# Altium PCB PCB-R1-DEPP.PcbDoc
Units mm, origin at the board's own origin, x right, y up, seen from the top; angles counter-clockwise.
Board outline 74.3 x 74.3 mm, 2 copper layers (Top Layer, Bottom Layer); 45 components, 44 nets, 189 pads, 38 vias.
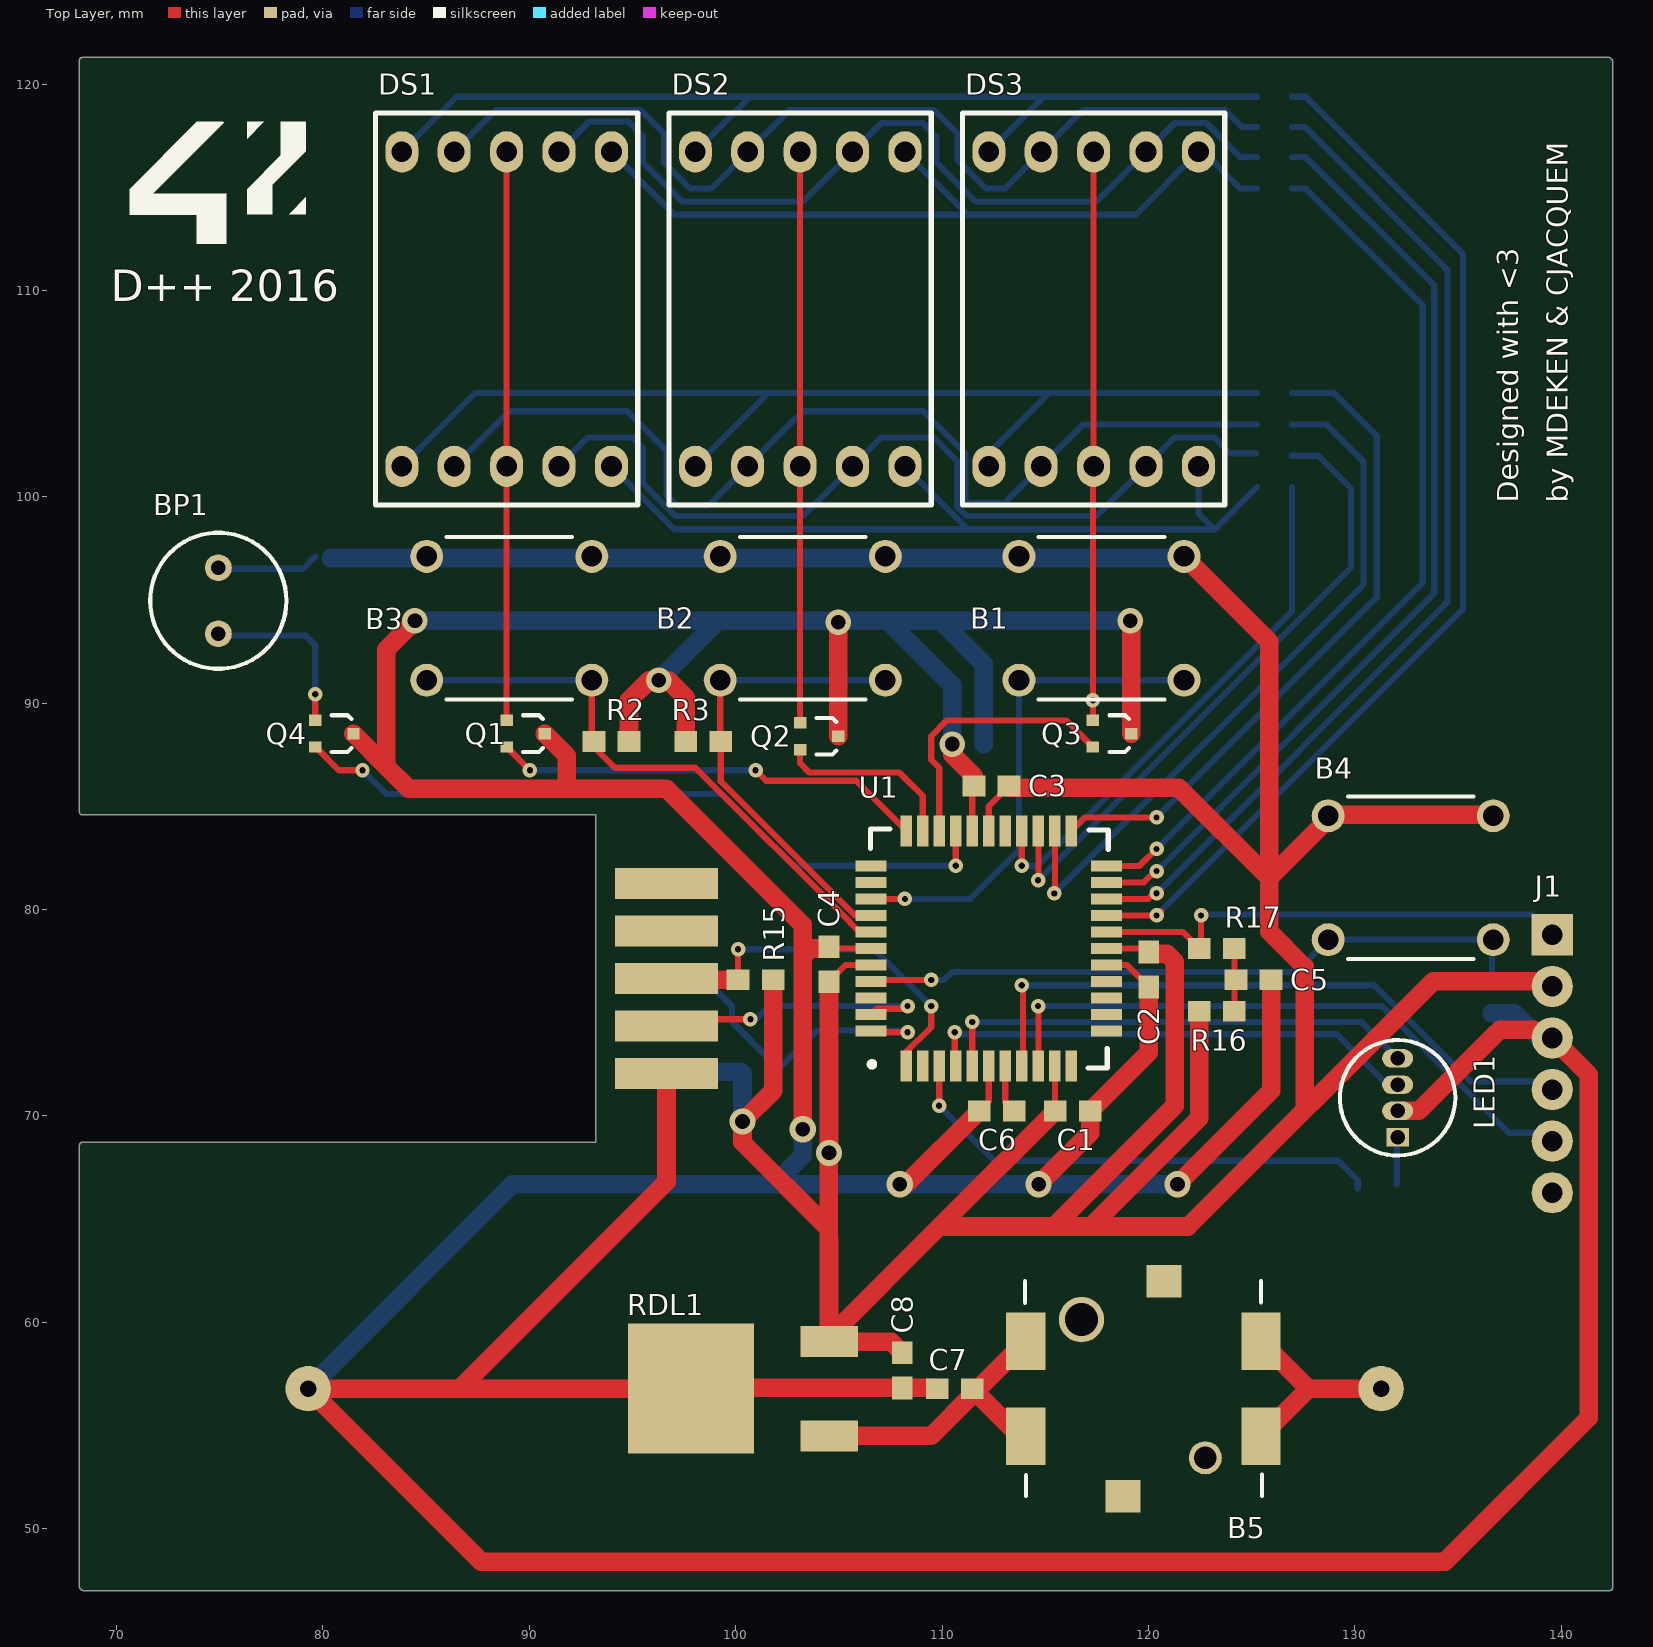
[diagram p0: Top Layer view]
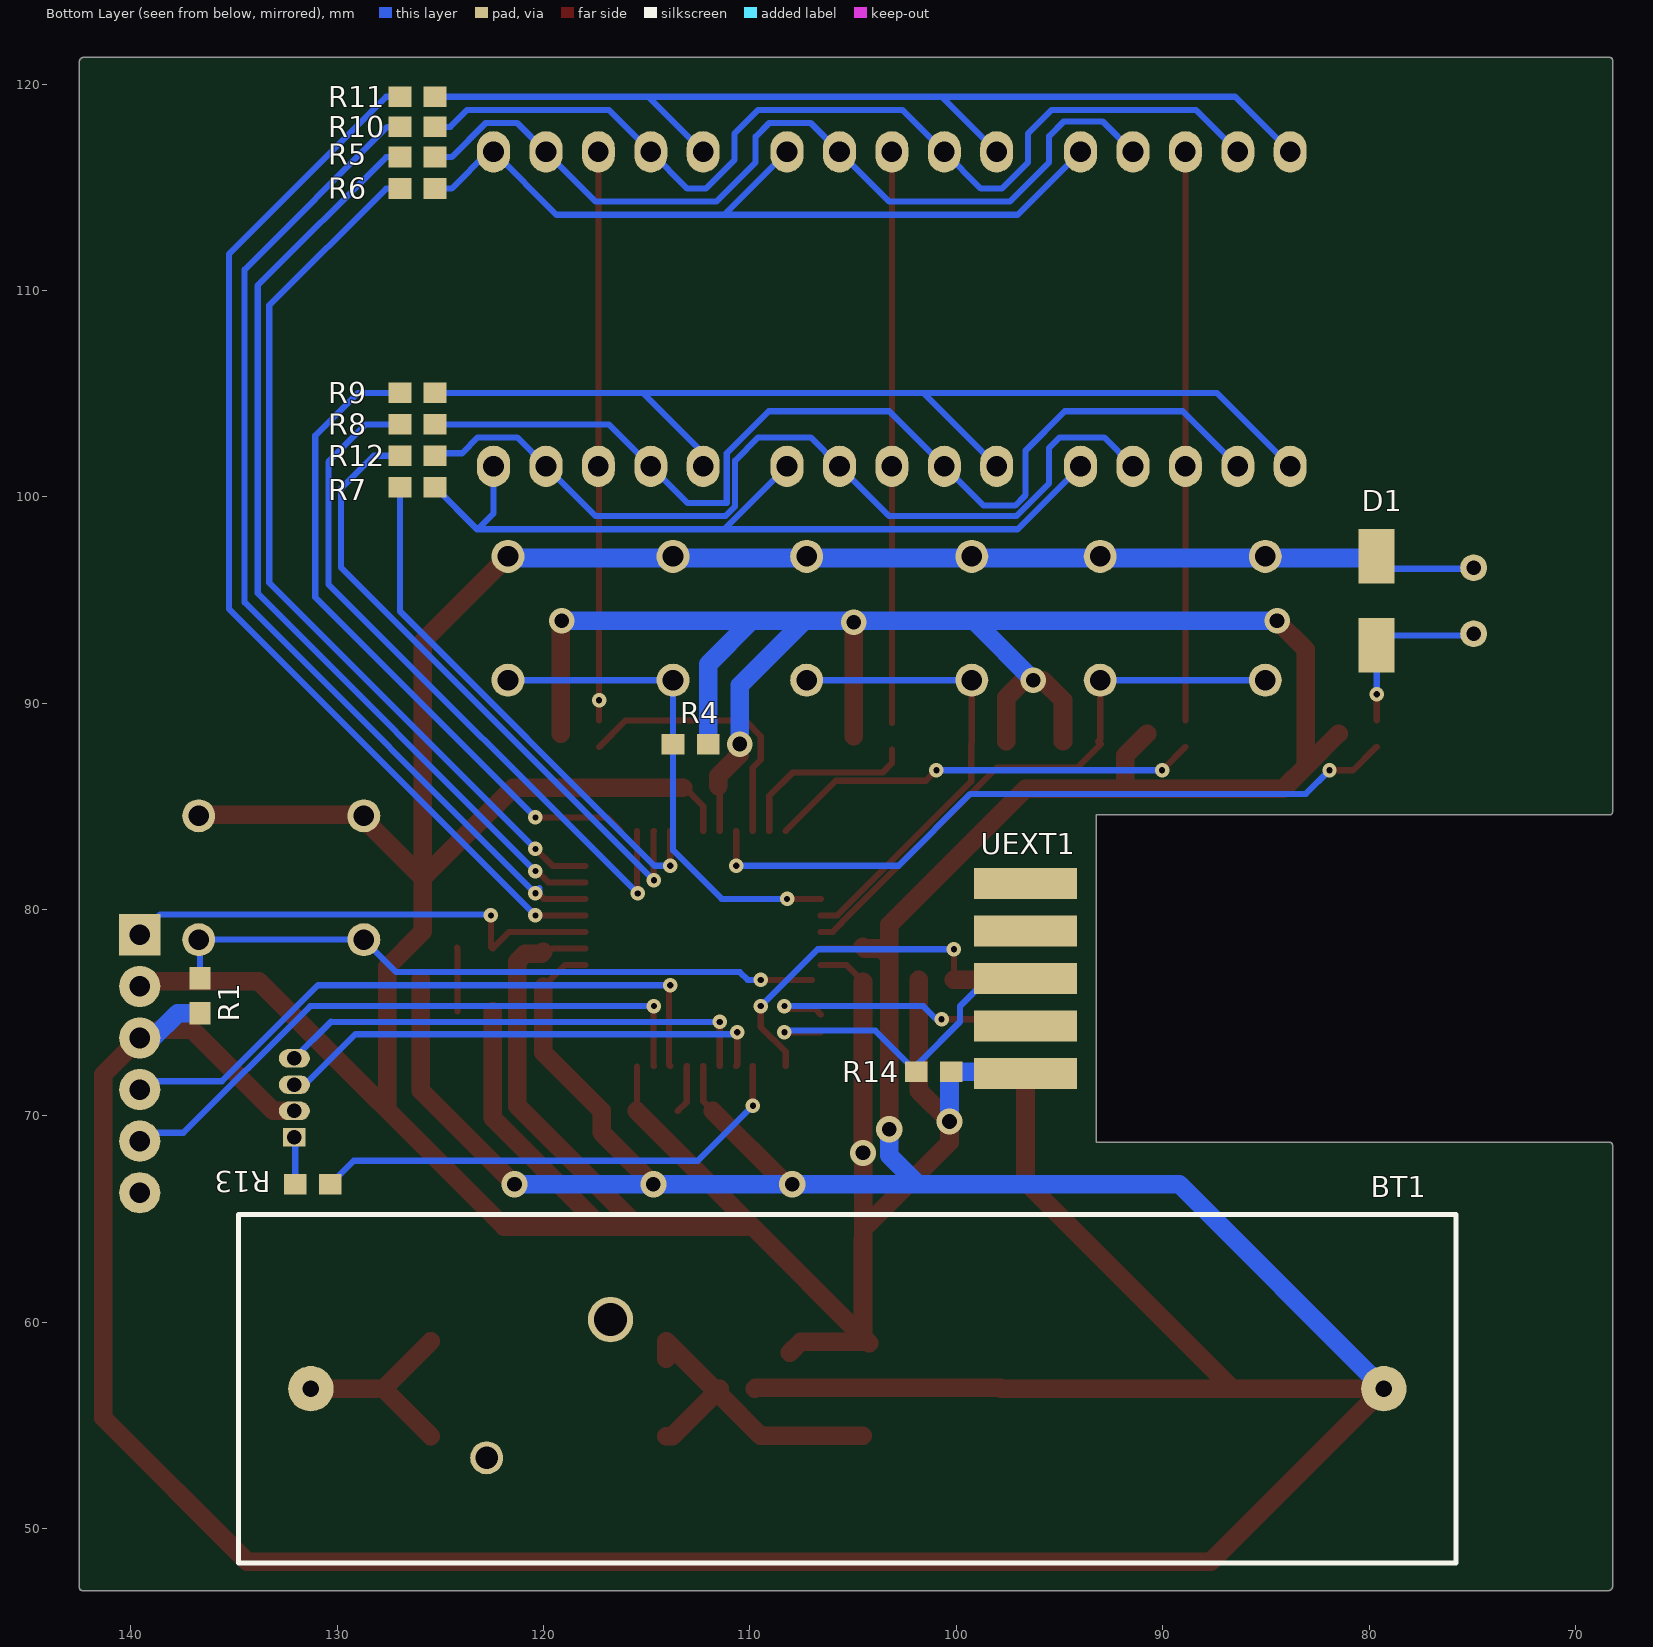
[diagram p1: Bottom Layer view, seen from below]

## Layer stack, top to bottom
Top Solder: solder mask 0.0102, Solder Resist, Dk 3.5
Top Layer: signal copper 0.0356
Dielectric 1: dielectric 0.32, FR-4, Dk 4.8
Bottom Layer: signal copper 0.0356
Bottom Solder: solder mask 0.0102, Solder Resist, Dk 3.5

## Board outline
68.259,47.05 cw(c68.326,47.158) 68.199,47.158 68.199,68.58 cw(c68.326,68.58) 68.326,68.707 93.218,68.707 93.218,84.582 68.326,84.582 cw(c68.326,84.709) 68.199,84.709 68.199,121.158 cw(c68.326,121.158) 68.326,121.285 142.326,121.285 cw(c142.326,121.158) 142.434,121.225 cw(c142.367,121.117) 142.494,121.117 142.494,47.117 cw(c142.367,47.117) 142.367,46.99 68.367,46.99 cw(c68.367,47.117)

## Design rules (kind name [scope] priority, off if disabled: settings)
Clearance [All] p1: gap=0.1
ComponentClearance [All] p1: gap=0.2 collisioncheckmode=3 verticalgap=0.2 showdistances=FALSE
MinimumSolderMaskSliver [All] p1: minsoldermaskwidth=0
PolygonConnect [All] p1: connectstyle=Relief reliefconductorwidth=0.254 reliefentries=4 polygonreliefangle="90 Angle" airgapwidth=0.254
RoutingVias [All] p1: holewidth=0.711 width=1.27 viastyle="Through Hole" minholewidth=0.711 minwidth=1.27 maxholewidth=0.711 maxwidth=1.27
SilkToSilkClearance [All] p1: silktosilkclearance=0.2
SilkToSolderMaskClearance [IsPad] p1: minsilkscreentomaskgap=0.2 clearancetoexposedcopper=TRUE
SolderMaskExpansion [All] p1: expansion=0.102
UnpouredPolygon [All] p1: allowunpoured=FALSE
Width [All] p1: maxlimit=1 minlimit=0.2 preferedwidth=0.7
25 further rules are at their usual default settings.

## Classes and differential pairs
net class RGB[0..2]: RGB0 RGB1 RGB2
net class DISPLAY[0..7]: DISPLAY0 DISPLAY1 DISPLAY2 DISPLAY3 DISPLAY4 DISPLAY5 DISPLAY6 DISPLAY7
net class DIS[0..2]: DIS0 DIS1 DIS2
net class BUTTON[0..3]: BUTTON0 BUTTON1 BUTTON2 BUTTON3
component class RGB: LED1 R13
component class POWER: B5 BT1 C7 C8 RDL1
component class PIC32: C1 C2 C3 C4 C5 C6 J1 R16 R17 U1
component class DISPLAY: DS1 DS2 DS3 Q1 Q2 Q3 R5 R6 R7 R8 R9 R10 R11 R12
component class BUZZER: BP1 D1 Q4
component class BUTTON: B1 B2 B3 B4 R1 R2 R3 R4
component class ACCELERO: R14 R15 UEXT1

## Components (designator, comment, footprint, x,y, rotation, side; value= is the part's Value field where it differs from the comment)
B1 "ESE20C" BUTTON_DIS#1 117.729,94.107 r180 top
B2 "ESE20C" BUTTON_DIS#1 103.251,94.107 r180 top
B3 "ESE20C" BUTTON_DIS#1 89.027,94.107 r180 top
B4 "ESE20C" BUTTON_DIS#2 132.715,81.534 r0 top
B5 "PVB4" "BUTTON ON/OFF" 119.761,56.769 r0 top
BP1 "Buzzer Piezo" BUZZER 74.93,94.957 r90 top
BT1 "Battery" SUP_PILE 105.283,56.769 r180 bottom
C1 "Cap" Capacitor 116.332,70.231 r180 top
C2 "Cap" Capacitor 120.015,77.089 r90 top
C3 "Cap" Capacitor 112.395,85.979 r0 top
C4 "Cap" Capacitor 104.521,77.343 r270 top
C5 "Cap" Capacitor 125.095,76.581 r180 top
C6 "Cap" Capacitor 112.649,70.231 r0 top
C7 "Cap" Capacitor 110.617,56.769 r0 top
C8 "Cap" Capacitor 108.077,57.658 r90 top
D1 "Diode" "PONT REDRESSEUR" 79.629,94.957 r90 bottom
DS1 "Dpy Red-CA" DISPLAY 88.9,109.093 r0 top
DS2 "Dpy Red-CA" DISPLAY 103.124,109.093 r0 top
DS3 "Dpy Red-CA" DISPLAY 117.348,109.093 r0 top
J1 "Program / Debug" ICSP 139.573,72.517 r90 top
LED1 "LED RGB" "Led RGB" 132.08,70.866 r90 top
Q1 "MOSFET-N" MOSFET 89.825,88.519 r180 top
Q2 "MOSFET-N" MOSFET 104.049,88.392 r180 top
Q3 "MOSFET-N" MOSFET 118.237,88.519 r180 top
Q4 "MOSFET-N" MOSFET 80.554,88.519 r180 top
R1 "Res1" RESISTANCE 136.652,75.819 r90 bottom
R2 "Res1" RESISTANCE 93.98,88.138 r180 top
R3 "Res1" RESISTANCE 98.425,88.138 r0 top
R4 "Res1" RESISTANCE 112.879,88.011 r0 bottom
R5 "Res1" RESISTANCE 126.111,116.459 r180 bottom
R6 "Res1" RESISTANCE 126.111,114.935 r180 bottom
R7 "Res1" RESISTANCE 126.111,100.457 r180 bottom
R8 "Res1" RESISTANCE 126.111,103.505 r180 bottom
R9 "Res1" RESISTANCE 126.111,105.029 r180 bottom
R10 "Res1" RESISTANCE 126.111,117.919 r180 bottom
R11 "Res1" RESISTANCE 126.111,119.38 r180 bottom
R12 "Res1" RESISTANCE 126.111,101.981 r180 bottom
R13 "Res1" RESISTANCE 131.191,66.675 r0 bottom
R14 "Res1" RESISTANCE 101.092,72.136 r180 bottom
R15 "Res1" RESISTANCE 100.965,76.581 r0 top
R16 "10K" RESISTANCE 123.317,75.057 r180 top
R17 "10K" RESISTANCE 123.317,78.105 r0 top
RDL1 "DPAK" REG_DEC_LIN 100.584,56.769 r90 top
U1 "PIC32MX230F256D" PIC32 112.268,78.105 r0 top
UEXT1 "BH10 - UEXT" ACCELERO 96.647,76.644 r0 bottom

## Footprints (in the part's own frame and the unit in brackets; to place one, negate y for a bottom-side part, rotate by r counter-clockwise, add the part's x,y. Pads: shape width x height; smd on the part's side, far side on the other; paste and mask are expansions set on the pad)
ACCELERO [mm]
  rect 5x1.5 smd: 1(0,4.6) 3(0,2.3) 5(0,0) 7(0,-2.3) 9(0,-4.6)
  rect 5x1.5 smd far side: 2(0,4.6) 4(0,2.3) 6(0,0) 8(0,-2.3) 10(0,-4.6)
"BUTTON ON/OFF" [mm]
  rect 1.9x2.8 smd: 1(5.7,2.3) 2(5.7,-2.3) 3(-5.7,2.3) 4(-5.7,-2.3)
  round 1.6 hole 1.1: 5(3,-3.35)
  round 2.2 hole 1.6: 6(-3,3.35)
  rect 1.7x1.575 smd: 7(1,5.212) 8(-1,-5.212)
  silkscreen extent -5.74,-5.21 5.74,5.21
BUTTON_DIS#1 [mm]
  round 1.6 hole 1: 1(-4,-3) 2(-4,3) 3(4,-3) 4(4,3)
  silkscreen extent -3.05,-3.94 3.05,3.94
BUTTON_DIS#2 [mm]
  round 1.6 hole 1: 1(-4,3) 2(-4,-3) 3(4,3) 4(4,-3)
  silkscreen extent -3.05,-3.94 3.05,3.94
BUZZER [mm]
  round 1.3 hole 0.7: 1(-1.6,0) 2(1.6,0)
  silkscreen extent -3.3,-3.3 3.3,3.3
Capacitor [mm]
  rect 1.1x1 smd: 1(-0.85,0) 2(0.85,0)
DISPLAY [mm]
  oval 1.6x2 hole 1: 1(-5.08,-7.62) 2(-2.54,-7.62) 3(0,-7.62) 4(2.54,-7.62) 5(5.08,-7.62) 6(5.08,7.62) 7(2.54,7.62) 8(0,7.62) 9(-2.54,7.62) 10(-5.08,7.62)
  silkscreen extent -6.35,-9.5 6.35,9.5
ICSP [mm]
  rect 2x2 hole 1: 1(6.25,0)
  round 2 hole 1: 2(3.75,0) 3(1.25,0) 4(-1.25,0) 5(-3.75,0) 6(-6.25,0)
"Led RGB" [mm]
  rect 0.9x1.1 hole 0.7: 1(-1.91,0)
  oval 0.9x1.5 hole 0.7: 2(-0.635,0) 3(0.635,0) 4(1.91,0)
  silkscreen extent -2.8,-2.8 2.8,2.8
MOSFET [mm]
  rect 0.6x0.55 smd: 1(0.925,-0.65) 2(0.925,0.65) 3(-0.925,0)
  silkscreen extent -0.83,-0.89 0.13,0.89
PIC32 [mm]
  rect 0.55x1.5 smd: 1(-4,-5.7) 2(-3.2,-5.7) 3(-2.4,-5.7) 4(-1.6,-5.7) 5(-0.8,-5.7) 6(0,-5.7) 7(0.8,-5.7) 8(1.6,-5.7) 9(2.4,-5.7) 10(3.2,-5.7) 11(4,-5.7) 23(4,5.7) 24(3.2,5.7) 25(2.4,5.7) 26(1.6,5.7) 27(0.8,5.7) 28(0,5.7) 29(-0.8,5.7) 30(-1.6,5.7) 31(-2.4,5.7) 32(-3.2,5.7) 33(-4,5.7)
  rect 1.5x0.55 smd: 12(5.7,-4) 13(5.7,-3.2) 14(5.7,-2.4) 15(5.7,-1.6) 16(5.7,-0.8) 17(5.7,0) 18(5.7,0.8) 19(5.7,1.6) 20(5.7,2.4) 21(5.7,3.2) 22(5.7,4) 34(-5.7,4) 35(-5.7,3.2) 36(-5.7,2.4) 37(-5.7,1.6) 38(-5.7,0.8) 39(-5.7,0) 40(-5.7,-0.8) 41(-5.7,-1.6) 42(-5.7,-2.4) 43(-5.7,-3.2) 44(-5.7,-4)
  silkscreen extent -5.79,-5.79 5.79,5.79
"PONT REDRESSEUR" [mm]
  rect 2.65x1.75 smd: 1(-2.15,0) 2(2.15,0)
REG_DEC_LIN [mm]
  rect 1.5x2.8 smd: 1(-2.286,-3.95) 3(2.286,-3.95)
  rect 6.3x6.1 smd: 2(0,2.75)
RESISTANCE [mm]
  rect 1.1x1 smd: 1(-0.85,0) 2(0.85,0)
SUP_PILE [mm]
  round 2.2 hole 0.79: 1(-26,0) 2(26,0)
  silkscreen extent -29.5,-8.45 29.5,8.45

## Part data
B1 B2 B3 B4: library part BUTTON_DIS, "Push switch"
B5: library part BUTTON_ON, "Push switch ON/OFF"
BP1: library part Speaker, "Buzzer piezo"
BT1: "One-cell Battery AA"
C1 C2 C3 C4 C5 C6 C7 C8: "Capacitor"
D1: "Default Diode"
DS1 DS2 DS3: "Afficheur 7-Segment"
J1: library part CON6
Q1 Q2 Q3 Q4: "N-Channel MOSFET"
R1 R2 R3 R4 R5 R6 R7 R8 R9 R10 R11 R12 R13 R14 R15: "Resistor"
R16 R17: library part Res1, "Resistor"
UEXT1: "Connection accelero module"

## Via types
v1: diameter 0.7, hole 0.3, Top Layer to Bottom Layer, 27 vias
v2: diameter 1.27, hole 0.711, Top Layer to Bottom Layer, 6 vias
v3: diameter 1.23, hole 0.711, Top Layer to Bottom Layer, 5 vias

## Nets (pads, with @x,y where several pads share a name; then routed paths per layer and width w, separated by ;. In a path a pad name is that pad's centre, name@x,y a point inside that pad or via, vN(x,y) a via of type N, cw(c..) or ccw(c..) an arc to the next point about the centre after c; other vN are vias at no path point)
ALIM: B5.1 B5.2 BT1.1 | length 10.1
  Top Layer w0.9: B5.2 127.761,56.769 ; B5.1 127.761,56.769 ; BT1.1@131.367,56.769 127.761,56.769
BUTTON0: B1.2 B1.4 R4.2 U1.36 | length 24.4
  Top Layer w0.3: U1.36 v1(108.204,80.505)
  Bottom Layer w0.3: v1(108.204,80.505) 111.366,80.505 113.729,82.868 R4.2 B1.4 B1.2
BUTTON1: B2.2 B2.4 R3.2 U1.37 | length 22.9
  Top Layer w0.3: B2.4 99.251,88.035 99.275,88.011 99.275,86.203 105.773,79.705 U1.37
  Bottom Layer w0.3: B2.4 B2.2
BUTTON2: B3.2 B3.4 R2.2 U1.38 | length 28.4
  Top Layer w0.3: R2.2@93.003,88.011 94.146,86.868 98.044,86.868 105.568,79.344 105.568,79.326 105.989,78.905 U1.38 ; B3.2 93.027,88.241 R2.2
  Bottom Layer w0.3: B3.4 B3.2
BUTTON3: B4.2 B4.4 R1.2 U1.41 | length 32.4
  Top Layer w0.3: U1.41@107,76.581 v1@109.592,76.581
  Bottom Layer w0.3: v1@109.592,76.581 110.109,76.581 110.49,76.962 127.143,76.962 B4.2 B4.4 ; B4.4@136.588,78.534 136.652,78.47 R1.2
  other v1: 109.474,76.581
BUZ: Q4.2 U1.30 | length 35.1
  Top Layer w0.3: Q4.2 79.644,87.869 80.772,86.741 v1(81.915,86.741) ; v1@110.668,82.093 v1(110.668,82.118) U1.30
  Bottom Layer w0.3: v1(81.915,86.741) 83.058,85.598 99.314,85.598 102.794,82.118 v1(110.668,82.118)
DIS0: Q1.2 U1.33 | length 20.7
  Top Layer w0.3: Q1.2 v1(90.028,86.741) ; v1(100.965,86.741) 101.473,86.233 105.84,86.233 U1.33
  Bottom Layer w0.3: v1(90.028,86.741) 100.584,86.741
DIS1: Q2.2 U1.32 | length 9
  Top Layer w0.3: Q2.2 103.124,87.071 103.562,86.633 107.931,86.633 109.068,85.496 U1.32
DIS2: Q3.2 U1.31 | length 13.4
  Top Layer w0.3: U1.31 109.868,86.855 109.474,87.249 109.474,88.392 110.236,89.154 116.027,89.154 Q3.2
DISPLAY0: R5.1 U1.21 | length 46.1
  Top Layer w0.3: U1.21 119.786,81.305 v1@120.396,81.915
  Bottom Layer w0.3: v1(120.396,81.856) 133.858,95.318 133.858,110.236 127.635,116.459 R5.1
DISPLAY1: R6.1 U1.22 | length 43.1
  Top Layer w0.3: U1.22 119.57,82.105 v1(120.396,82.931)
  Bottom Layer w0.3: v1(120.396,82.931) 133.293,95.828 133.293,109.277 127.635,114.935 R6.1
DISPLAY2: R7.1 U1.26 | length 25.9
  Top Layer w0.3: v1(113.868,82.118) U1.26
  Bottom Layer w0.3: v1(113.868,82.118) 114.63,82.118 126.961,94.449 R7.1
DISPLAY3: R8.1 U1.24 | length 34.4
  Top Layer w0.3: v1(115.443,80.772) 115.468,80.797 U1.24
  Bottom Layer w0.3: v1(115.443,80.772) 130.429,95.758 130.429,101.688 128.612,103.505 R8.1
DISPLAY4: R9.1 U1.23 | length 32.3
  Top Layer w0.3: U1.23 116.918,84.455 v1(120.396,84.455)
  Bottom Layer w0.3: v1(120.396,84.455) 131.064,95.123 131.064,102.958 128.993,105.029 R9.1
DISPLAY5: R10.1 U1.20 | length 49.1
  Top Layer w0.3: U1.20 120.002,80.505 v1@120.269,80.772
  Bottom Layer w0.3: v1@120.196,80.78 v1@120.196,81.026 ; v1(120.396,80.78) 134.493,94.877 134.493,110.998 127.572,117.919 R10.1
DISPLAY6: R11.1 U1.19 | length 52.3
  Top Layer w0.3: U1.19 v1(120.396,79.705) ; v1@120.396,79.905 v1@120.599,79.905
  Bottom Layer w0.3: v1(120.396,79.705) 135.255,94.564 135.255,111.76 127.635,119.38 R11.1
DISPLAY7: R12.1 U1.25 | length 31.2
  Top Layer w0.3: U1.25 114.681,83.792 v1@114.681,81.407
  Bottom Layer w0.3: v1(114.655,81.407) 129.813,96.565 129.813,100.399 128.231,101.981 R12.1
GND: BT1.2 C1.1 C2.1 C3.1 C4.1 C5.1 C6.1 C7.1 C8.1 J1.3 LED1.2 Q1.3 Q2.3 Q3.3 Q4.3 R1.1 R2.1 R3.1 R4.1 RDL1.2 U1.6 U1.16 U1.29 U1.39 UEXT1.2 | length 357.6
  Top Layer w0.3: C4.1@104.609,78.105 U1.39 ; U1.29 111.468,85.902 C3.1 ; C6.1 112.268,70.7 U1.6 ; U1.16 118.949,77.305 C2.1
  Top Layer w0.9: Q4.3 83.058,86.94 ; v3(84.455,93.98) 83.058,92.583 83.058,86.94 ; Q1.3 91.821,87.448 91.821,85.852 ; R2.1 94.83,90.131 95.806,91.107 v3(96.266,91.107) 96.726,91.107 97.575,90.258 R3.1 ; UEXT1.2 96.647,66.802 86.614,56.769 ; v2(103.251,69.342) 103.251,77.724 ; C4.1 104.433,78.105 103.632,78.105 103.251,77.724 ; Q2.3 v3(104.974,93.908) ; v2(107.95,66.675) 108.243,66.675 C6.1 ; C7.1 109.728,56.808 C8.1 97.873,56.808 RDL1.2 86.614,56.769 ; v3(110.49,88.011) 110.49,87.503 111.545,86.448 C3.1 ; v2(114.681,66.675) 117.182,69.176 C1.1 120.015,73.064 C2.1 ; Q3.3 v3@119.162,93.635 ; v2(121.412,66.675) 125.945,71.208 C5.1 ; LED1.2 133.097,70.231 136.887,74.021 ; 137.041,74.175 J1.3@138.684,74.175 ; J1.3 141.351,71.989 141.351,55.372 134.366,48.387 87.665,48.387 BT1.2 86.614,56.769 ; 83.058,86.94 84.157,85.841 91.051,85.841 91.062,85.852 91.821,85.852 ; 91.821,85.852 96.647,85.852 103.251,79.248 103.251,77.724
  Bottom Layer w0.9: BT1.2 89.189,66.675 101.854,66.675 ; v3(84.455,93.98) 109.933,93.98 ; v3(96.266,91.107) 99.06,93.901 ; v2(103.251,69.342) 103.251,68.072 101.854,66.675 ; 107.442,93.901 110.49,90.853 v3(110.49,88.011) ; 110.109,93.804 110.109,93.98 ; R4.1 112.029,91.884 109.933,93.98 ; v3@119.155,93.98 v3(119.126,93.98) 110.109,93.98 ; v2(121.412,66.675) v2(114.681,66.675) v2(107.95,66.675) 101.854,66.675 ; R1.1 137.736,74.969 138.938,73.767 J1.3 ; 109.933,93.98 110.109,93.98
INT: U1.43 UEXT1.4 | length 14
  Top Layer w0.3: UEXT1.4 96.979,74.676 v1(100.711,74.676) ; U1.43 106.843,75.18 108.2,75.18 v1(108.331,75.311)
  Bottom Layer w0.3: v1(100.711,74.676) 100.965,74.676 101.6,75.311 v1(108.331,75.311)
MCLR: J1.1 R17.1 U1.18 | length 23.8
  Top Layer w0.3: U1.18 121.667,78.905 R17.1 122.555,78.193 v1@122.555,79.502
  Bottom Layer w0.3: v1@122.555,79.823 v1@122.637,79.905 ; v1@122.637,79.584 122.809,79.756 138.584,79.756 J1.1
  other v1: 122.555,79.705
NetB5_3: B5.3 B5.4 C7.2 RDL1.1 | length 16
  Top Layer w0.9: RDL1.1 109.474,54.483 111.467,56.476 C7.2 ; B5.4 113.767,54.469 C7.2 ; B5.3@114.061,58.22 B5.3 111.761,56.769 C7.2
NetBP1_1: BP1.1 D1.1 Q4.1 | length 8.5
  Top Layer w0.3: Q4.1 v1(79.629,90.424)
  Bottom Layer w0.3: BP1.1@74.93,93.269 79.167,93.269 D1.1 v1(79.629,90.424)
NetC5_2: C5.2 R16.1 R17.2 | length 3.1
  Top Layer w0.3: R16.1 R17.2 R17.2@124.206,78.144
NetC6_2: C6.2 U1.7 | length 2.4
  Top Layer w0.3: U1.7 113.068,70.662 C6.2
NetDS1_3: DS1.3 DS1.8 Q1.1 | length 27.5
  Top Layer w0.3: Q1.1 DS1.3 DS1.8
NetDS2_3: DS2.3 DS2.8 Q2.1 | length 27.7
  Top Layer w0.3: Q2.1 DS2.3 DS2.8
NetDS3_3: DS3.3 DS3.8 Q3.1 | length 27.5
  Top Layer w0.3: Q3.1 v1(117.312,90.134) DS3.3@117.312,101.437 ; DS3.3 DS3.8
NetLED1_1: LED1.1 R13.2 | length 2.3
  Bottom Layer w0.3: R13.2 132.041,68.917 LED1.1
PGEC: J1.5 U1.9 | length 29.2
  Top Layer w0.3: U1.9 114.681,72.418 v1@114.681,75.311
  Bottom Layer w0.3: v1@114.935,75.311 131.318,75.311 137.454,69.175 J1.5@138.684,69.175
  other v1: 114.655,75.311
PGED: J1.4 U1.8 | length 30.6
  Top Layer w0.3: U1.8 113.919,72.456 v1@113.919,76.327
  Bottom Layer w0.3: v1@113.919,76.327 130.937,76.327 135.589,71.675 J1.4@138.684,71.675
  other v1: 113.868,76.327
R_DISPLAY0: DS1.7 DS2.7 DS3.7 R5.2 | length 42.9
  Bottom Layer w0.3: DS1.7 92.91,118.183 94.796,118.183 95.504,117.475 95.504,116.205 97.409,114.3 103.251,114.3 DS2.7 107.061,118.11 109.068,118.11 109.728,117.45 109.728,116.205 111.633,114.3 117.475,114.3 DS3.7 121.285,118.11 122.809,118.11 124.46,116.459 R5.2
R_DISPLAY1: DS1.6 DS2.6 DS3.6 R6.2 | length 38.9
  Bottom Layer w0.3: DS1.6 97.028,113.665 111.252,113.665 ; DS2.6 111.252,113.665 ; R6.2 124.46,114.935 122.682,116.713 DS3.6 119.38,113.665 111.252,113.665
R_DISPLAY2: DS1.4 DS2.4 DS3.4 R12.2 | length 43.3
  Bottom Layer w0.3: DS1.4 92.837,102.87 94.996,102.87 95.504,102.362 95.504,100.653 97.097,99.06 103.251,99.06 DS2.4 107.061,102.87 109.601,102.87 110.725,101.746 110.725,99.529 111.194,99.06 117.475,99.06 DS3.4 121.285,102.87 123.19,102.87 123.952,102.108 R12.2@125.222,102.108
R_DISPLAY3: DS1.2 DS2.2 DS3.2 R8.2 | length 49.9
  Bottom Layer w0.3: DS1.2 89.027,104.14 94.742,104.14 96.647,102.235 96.647,100.076 97.155,99.568 98.679,99.568 DS2.2 103.251,104.14 109.093,104.14 111.125,102.108 111.125,99.695 113.03,99.695 DS3.2 116.84,103.505 R8.2
R_DISPLAY4: DS1.1 DS2.1 DS3.1 R9.2 | length 52.7
  Bottom Layer w0.3: DS1.1 87.376,105.029 101.6,105.029 ; DS2.1 101.6,105.029 ; DS3.1 112.268,102.108 115.189,105.029 ; R9.2 115.189,105.029 ; 101.6,105.029 115.189,105.029
R_DISPLAY5: DS1.9 DS2.9 DS3.9 R10.2 | length 48
  Bottom Layer w0.3: DS1.9 88.392,118.745 95.377,118.745 96.52,117.602 96.52,116.205 97.79,114.935 98.806,114.935 DS2.9 102.616,118.745 109.601,118.745 110.744,117.602 110.744,116.332 112.141,114.935 113.03,114.935 DS3.9 116.84,118.745 123.698,118.745 124.523,117.919 R10.2
R_DISPLAY6: DS1.10 DS2.10 DS3.10 R11.2 | length 50.1
  Bottom Layer w0.3: DS1.10 86.487,119.38 114.935,119.38 ; DS2.10 100.711,119.38 ; DS3.10 114.935,119.38 ; R11.2 114.935,119.38
R_DISPLAY7: DS1.5 DS2.5 DS3.5 R7.2 | length 41.2
  Bottom Layer w0.3: DS1.5 97.028,98.425 123.19,98.425 ; DS2.5 111.252,98.425 ; DS3.5@122.594,101.473 DS3.5 122.428,99.187 123.19,98.425 ; R7.2 123.229,98.425 123.19,98.425
RGB0: R13.1 U1.3 | length 24.1
  Top Layer w0.3: v1@109.868,70.498 U1.3
  Bottom Layer w0.3: v1(109.855,70.485) 112.522,67.818 129.198,67.818 130.15,66.865 R13.1@130.15,66.484
RGB1: LED1.3 U1.4 | length 24.2
  Top Layer w0.3: v1(110.617,74.041) 110.617,72.456 U1.4
  Bottom Layer w0.3: v1@110.668,74.203 110.922,73.949 129.124,73.949 131.579,71.494 LED1.3@132.073,71.494
RGB2: LED1.4 U1.5 | length 23.5
  Top Layer w0.3: U1.5 v1(111.468,74.549)
  Bottom Layer w0.3: v1(111.468,74.549) 130.302,74.549 130.304,74.551 LED1.4
SCL: R14.1 U1.44 UEXT1.5 | length 16.8
  Top Layer w0.3: U1.44@106.568,74.041 v1(108.331,74.041)
  Bottom Layer w0.3: UEXT1.5 98.489,76.644 99.822,75.311 99.822,74.549 101.794,72.577 R14.1@101.794,71.988 ; R14.1 103.932,74.126 v1@108.331,74.126
SDA: R15.1 U1.1 UEXT1.6 | length 18.9
  Top Layer w0.3: UEXT1.6 UEXT1.6@96.71,76.581 ; R15.1 v1(100.115,78.066) ; U1.1 108.268,73.089 109.474,74.295 v1(109.474,75.311)
  Top Layer w0.9: UEXT1.6@96.71,76.581 R15.1
  Bottom Layer w0.3: v1(100.115,78.066) 106.719,78.066 v1(109.474,75.311)
V3P3: B1.1 B1.3 B2.1 B2.3 B3.1 B3.3 B4.1 B4.3 BP1.2 C1.2 C2.2 C3.2 C4.2 C8.2 D1.2 J1.2 R14.2 R15.2 R16.2 RDL1.3 U1.10 U1.17 U1.28 U1.40 UEXT1.1 | length 231.9
  Top Layer w0.3: C4.2 105.333,77.305 U1.40 ; U1.28 112.268,85.002 C3.2 ; C1.2 U1.10@115.482,72.391 ; U1.17 119.595,78.105 C2.2@119.761,77.939
  Top Layer w0.9: R15.2 101.815,71.208 v2(100.33,69.723) 100.33,68.707 104.51,64.527 104.51,64.019 ; RDL1.3@104.223,58.972 RDL1.3@104.521,59.27 ; RDL1.3@104.521,59.055 RDL1.3@104.521,59.27 ; C4.2 v2(104.521,68.199) 104.51,68.188 104.51,64.019 ; RDL1.3 107.53,59.055 C8.2 ; C3.2@113.245,85.901 121.475,85.901 125.857,81.519 ; 115.443,64.643 121.285,70.485 121.285,77.47 120.904,77.851 120.103,77.851 C2.2 ; C1.2 109.881,64.63 ; 117.221,64.643 122.467,69.889 R16.2 ; B1.1 125.857,92.979 125.857,81.519 ; 127.572,70.282 127.572,77.211 125.857,78.926 125.857,81.519 ; B4.3@136.525,84.582 128.92,84.582 125.857,81.519 ; J1.2@138.684,76.521 133.811,76.521 121.92,64.63 109.881,64.63 ; 104.51,64.019 104.521,64.008 RDL1.3@104.521,59.27 ; RDL1.3@104.521,59.27 109.881,64.63
  Bottom Layer w0.3: BP1.2@74.93,96.511 79.033,96.511 D1.2
  Bottom Layer w0.9: D1.2@80.385,97.028 B1.1@121.729,97.028 ; UEXT1.1 UEXT1.1@96.651,72.048 ; UEXT1.1@96.739,72.136 R14.2 100.33,72.048 v2(100.33,69.723)
pads on no net: B5.5 B5.6 B5.7 B5.8 J1.6 U1.2 U1.11 U1.12 U1.13 U1.14 U1.15 U1.27 U1.34 U1.35 U1.42 UEXT1.3 UEXT1.7 UEXT1.8 UEXT1.9 UEXT1.10

## Silkscreen, mask and mechanical layers (free items; w line width, h text height)
Top Overlay:
  region: 77.14,118.161 76.327,118.161 76.327,117.348
  region: 78.359,113.69 79.172,113.69 79.172,114.503
  region: 79.172,116.738 79.172,118.161 77.953,118.161 77.953,116.535 76.327,114.91 76.327,113.69 77.546,113.69 77.546,115.113
  region: 75.311,114.706 75.311,112.268 73.889,112.268 73.889,113.69 73.863,113.665 70.637,113.665 70.637,114.91 73.889,118.161 75.133,118.161 75.184,118.145 75.184,118.11 71.755,114.681
  text "D++ 2016" at 69.723,109.474 h1.52
  text "Designed with <3" at 137.922,99.695 h1 r90
  text "by MDEKEN & CJACQUEM" at 140.335,99.695 h1 r90
Mechanical 1:
  lines w0.254: 68.326,47.158 68.326,68.58 93.345,68.58 93.345,84.709 68.326,84.709 68.326,121.158 142.326,121.158 ; 68.367,47.117 142.367,47.117 142.367,121.117